# Altium PCB Pince-1.PcbDoc
Units mm, origin at the board's own origin, x right, y up, seen from the top; angles counter-clockwise.
Board outline 124 x 124 mm, 2 copper layers (Top Layer, Bottom Layer), stack 1.621 mm thick; 1 components, 2 nets, 30 pads, 0 vias.
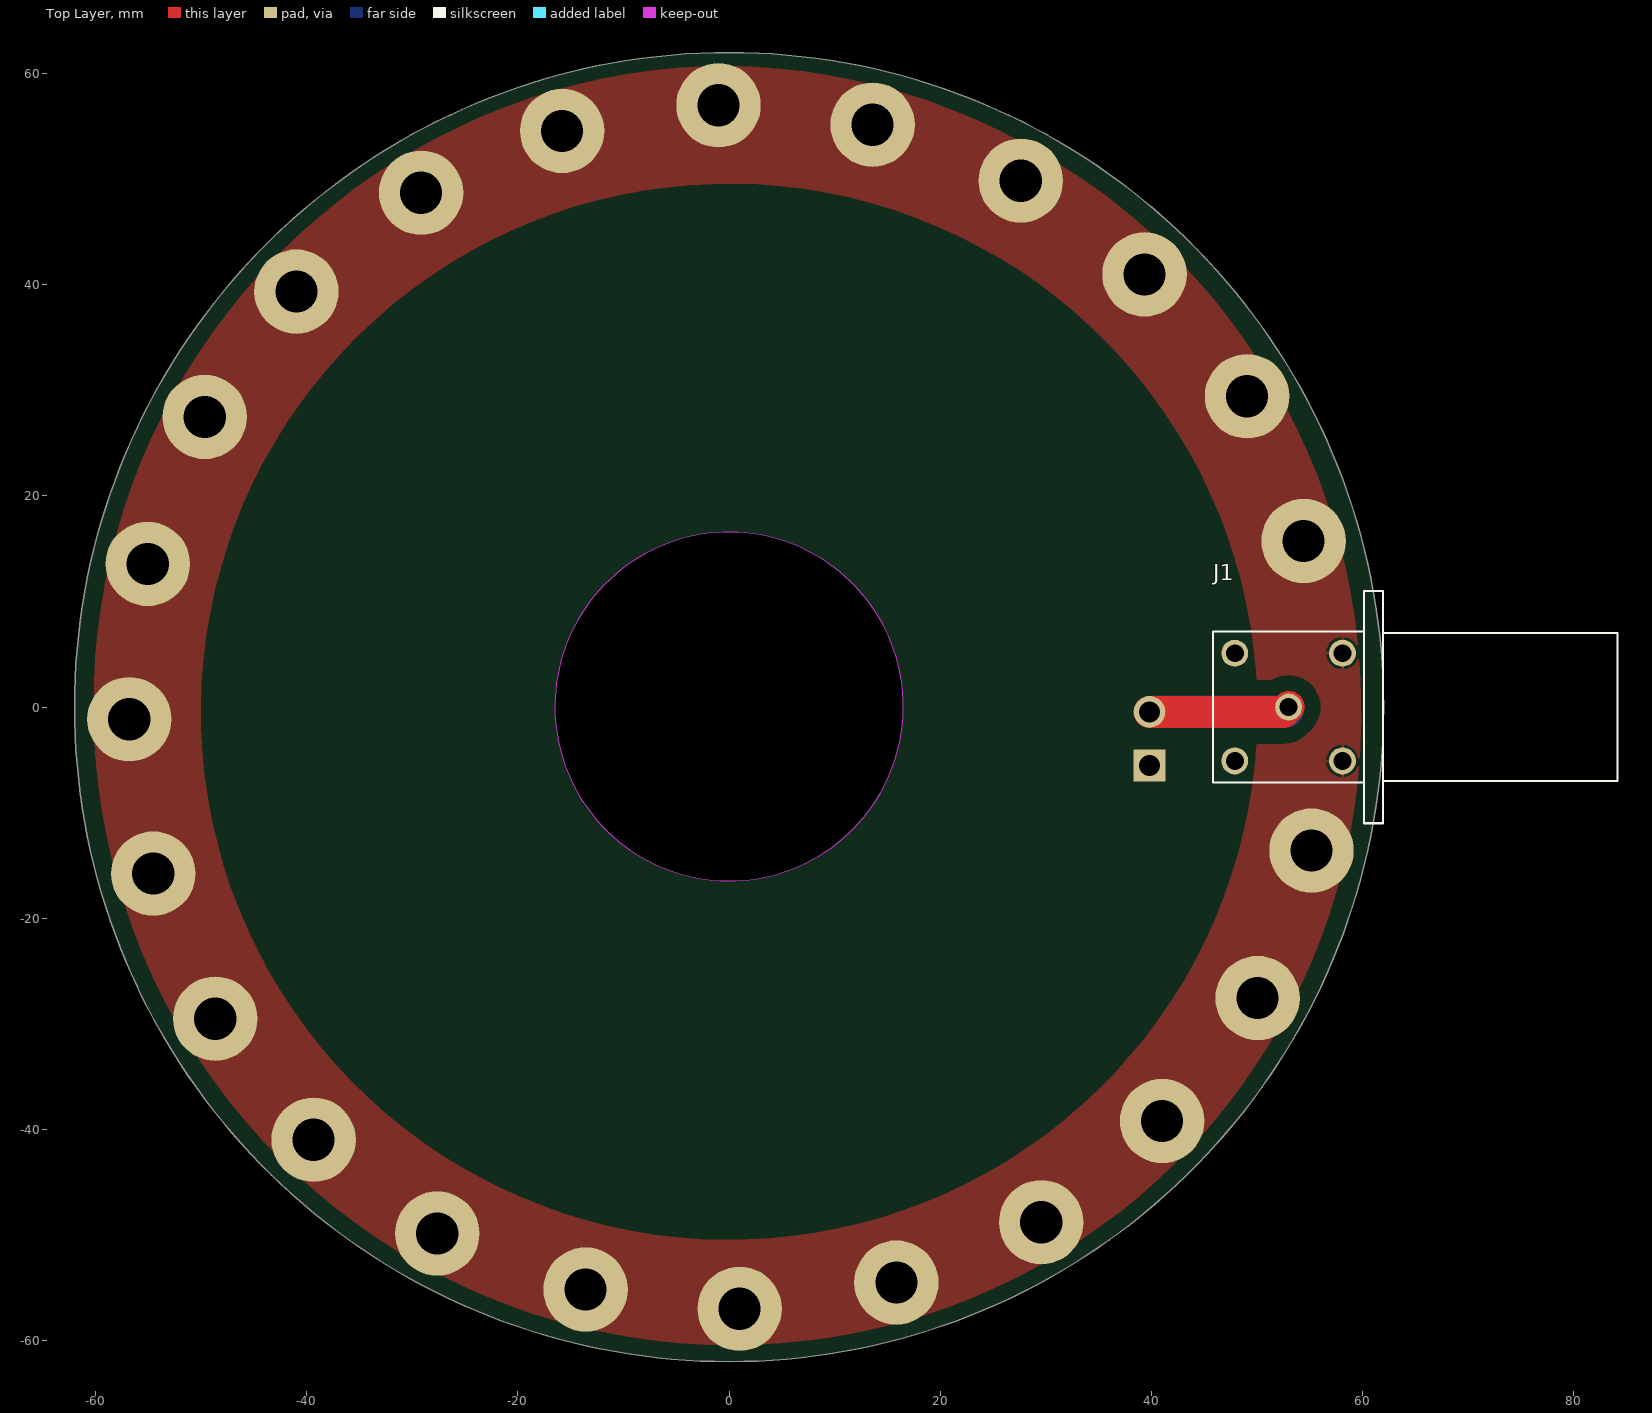
[diagram p0: Top Layer view]
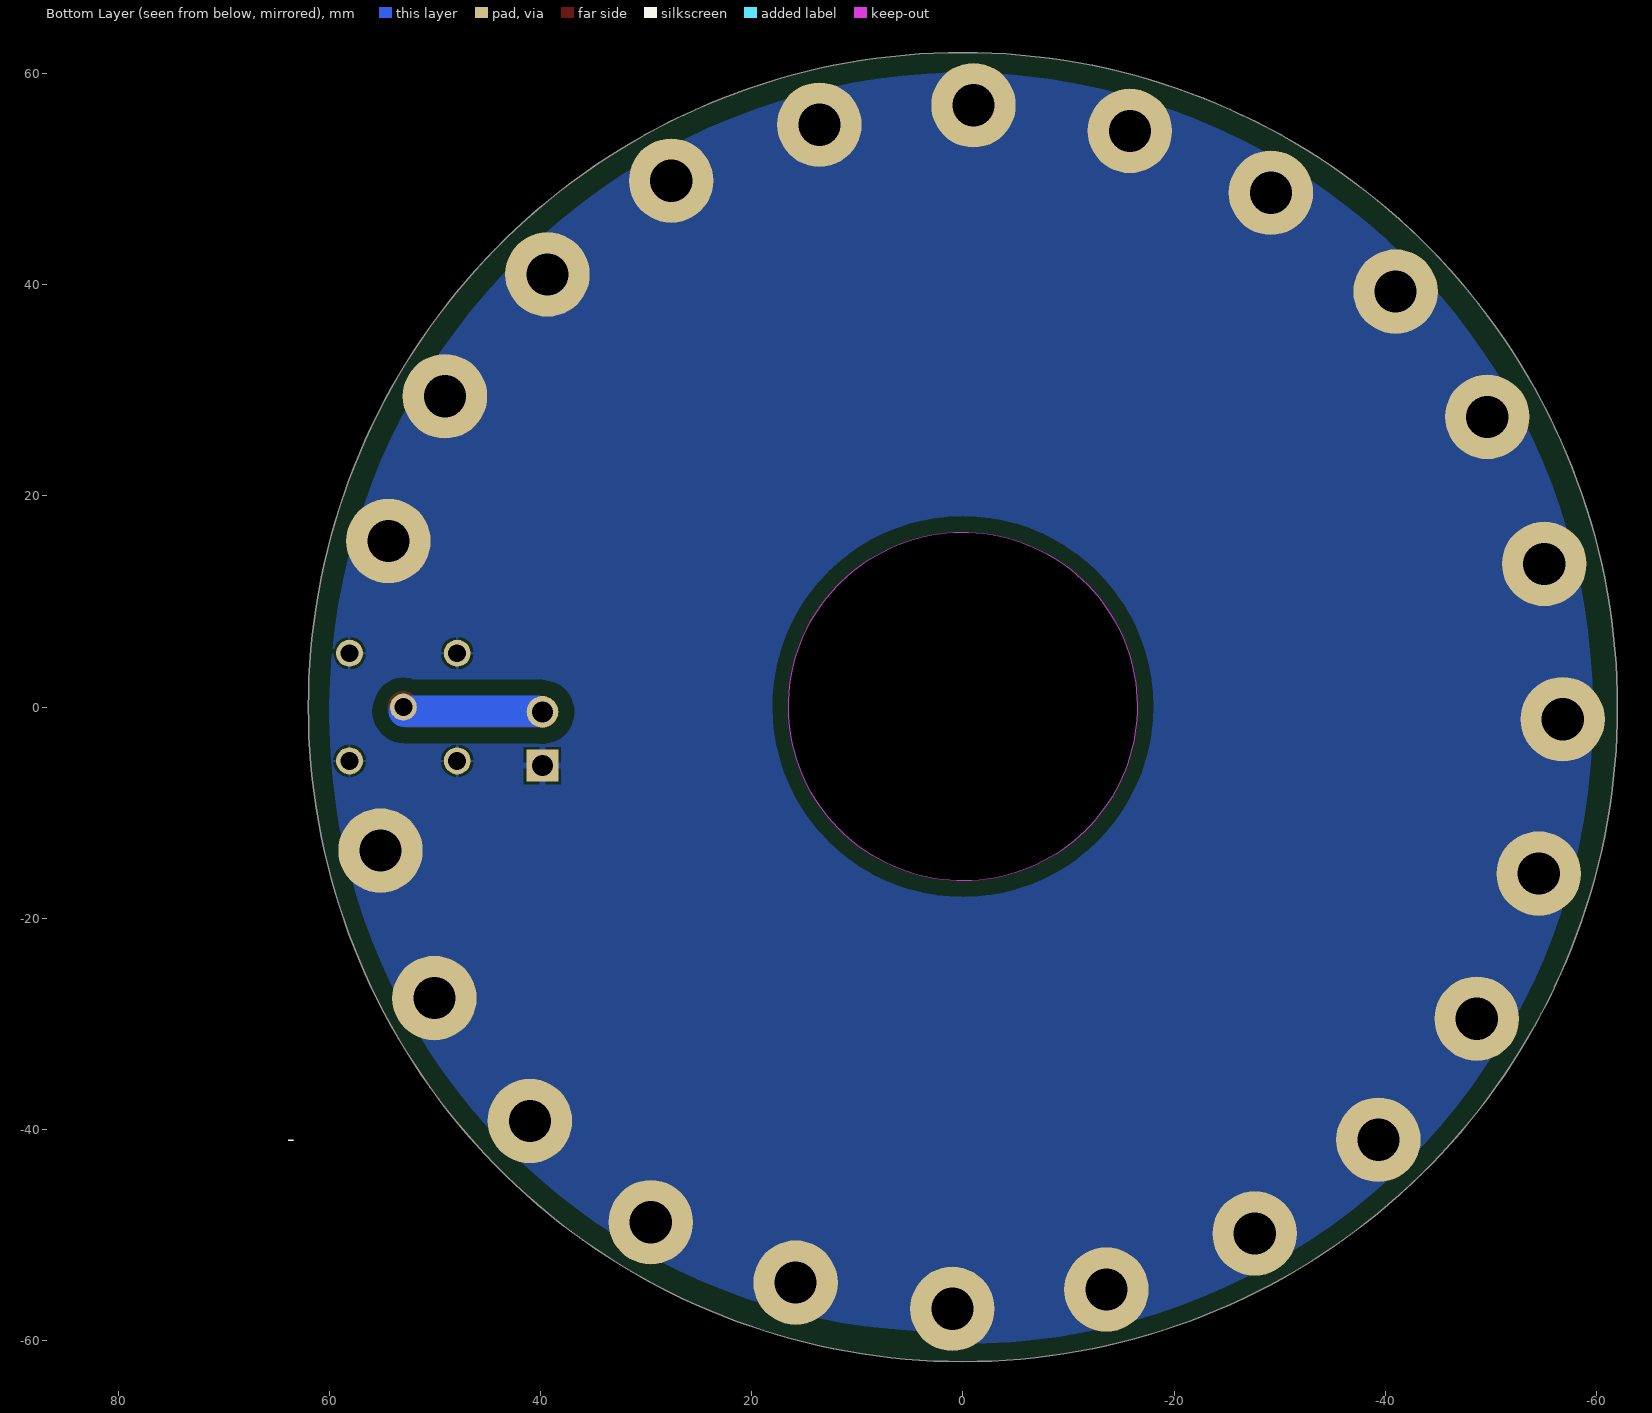
[diagram p1: Bottom Layer view, seen from below]

## Layer stack, top to bottom
Top Solder: solder mask 0.0102, Solder Resist, Dk 3.5
Top Layer: signal copper 0.0356
Dielectric 1: dielectric 1.55, FR-4, Dk 4.8
Bottom Layer: signal copper 0.0356
Bottom Solder: solder mask 0.0102, Solder Resist, Dk 3.5

## Board outline
0,-62 cw(c0,0) -62,0 cw(c0,0) 0,62 cw(c0,0) 62,0 cw(c0,0)
cut-out: -16.496,-0.505 ccw(c0.004,0.052) 16.504,0.609 ccw(c0.004,0.052)

## Design rules (kind name [scope] priority, off if disabled: settings)
Clearance Clearance_1 [InNamedPolygon('NONET_L-01_P-001')] p1: gap=1.5 ignorepadtopadclearanceinfootprint=FALSE
Clearance [All] p2: gap=0.254 ignorepadtopadclearanceinfootprint=FALSE except(0: Arc-Hole Track-Hole SMDPad-Hole THPad-Hole Via-Hole Fill-Hole Poly-Hole Region-Hole Text-Hole)
PolygonConnect [All] p1: connectstyle=Relief reliefconductorwidth=0.254 reliefentries=4 polygonreliefangle="90 Angle" airgapwidth=0.254
RoutingVias [All] p1: holewidth=0.711 width=1.27 viastyle="Through Hole" minholewidth=0.711 minwidth=1.27 maxholewidth=0.711 maxwidth=1.27
SolderMaskExpansion [All] p1: expansion=0.102 istentingtop=FALSE
Width [All] p1: maxlimit=5 minlimit=0.254 preferedwidth=0.6 minimp=50.000000 maximp=50.000000 favimp=50.000000
30 further rules are at their usual default settings.

## Components (designator, comment, footprint, x,y, rotation, side; value= is the part's Value field where it differs from the comment)
J1 "60411042241501" 60411042241501 53,0 r90 top

## Footprints (in the part's own frame and the unit in brackets; to place one, negate y for a bottom-side part, rotate by r counter-clockwise, add the part's x,y. Pads: shape width x height; smd on the part's side, far side on the other; paste and mask are expansions set on the pad)
60411042241501 [mm] "N Type PCB THT Jack"
  round 2.55 hole 1.7: 1(0,0) 2(-5.1,5.1) 3(5.1,5.1) 4(5.1,-5.1) 5(-5.1,-5.1)
  silkscreen extent -11,-31.15 11,7.15, body extent -11,-31.15 11,7.15, height 24.5

## Part data
J1: "WR-NTYPE N Type PCB Connector, Right Angle Jack, DC~4GHz, 50Ohm", Frequency Range=DC~4GHz, Manufacturer="Wurth Elektronik", Operating Temperature Max=165°C, Operating Temperature Min=-65°C, Category="Coaxial Connectors", Center Contact Diameter=1.6mm, ComponentLink1Description="Website Link", ComponentLink1URL=https://www.we-online.com/redexpert/article/60411042241501?ad, ComponentLink2Description="Datasheet Link", ComponentLink2URL=https://www.we-online.com/redexpert/spec/60411042241501?ad, Gender=Jack, Impedance=50Ohm, Manufacturer Part Number=60411042241501, Match Code=WR-NTYPE, Mount="Through Hole", Orientation="Right Angle", Packaging=Tray, Panel Thickness=6.5mm

## Free pads (board coordinates)
  rect 3x3 hole 2: 1(39.825,-5.54)
  round 3 hole 2: 2(39.825,-0.46)
  round 8 hole 4: 11(-56.804,-1.15) 11(-55.064,13.557) 11(-54.542,-15.773) 11(-49.667,27.484) 11(-48.667,-29.516) 11(-40.98,39.353) 11(-39.353,-40.98) 11(-29.17,48.713) 11(-27.634,-49.863) 11(-15.813,54.571) 11(-13.591,-55.166) 11(-1,57) 11(1,-57) 11(13.591,55.166) 11(15.849,-54.514) 11(27.634,49.863) 11(29.562,-48.793) 11(39.353,40.98) 11(41.016,-39.207) 11(49.059,29.436) 11(50.059,-27.564) 11(54.42,15.729) 11(55.166,-13.591)

## Nets (pads, with @x,y where several pads share a name; then routed paths per layer and width w, separated by ;. In a path a pad name is that pad's centre, name@x,y a point inside that pad or via, vN(x,y) a via of type N, cw(c..) or ccw(c..) an arc to the next point about the centre after c; other vN are vias at no path point)
NetJ1_1: J1.1 pad.2 | length 26
  Top Layer w3: pad.2 52.54,-0.46 J1.1
  Bottom Layer w3: pad.2@40.283,-0.4 J1.1@52.917,-0.4
NetJ1_2: J1.2 J1.3 J1.4 J1.5 pad.1 pad.11

## Polygon pours and split planes (outlines as drawn)
NetJ1_2 on Bottom Layer "NONET_L-01_P-001" (solid, pour order 1): -59.621,-2.313 ccw(c-0.174,-0.827) 1.312,-60.273 1.312,-59.147 ccw(c1.591,-0.738) 60,-1.016 ccw(c-0.662,-0.528) -0.174,60.134 ccw(c0.668,-0.174) -59.639,-1.016
no net on Bottom Solder "NONET_L-01_P-001" (solid): -1.8,41.3 0.7,41.3 0.7,31.3 ccw(c0.4,31.3) 0.4,31.6 0,31.6
NetJ1_2 on Top Layer "NONET_L-01_P-001" (solid, pour order 0): -60.148,-1.4 ccw(c0.093,-0.166) 1.327,-60.407 ccw(c0.38,-0.947) 59.84,0 ccw(c-1.08,-0.17) -1.25,60.75 ccw(c0.275,0.327) -60.148,-1.199

## Other copper
Top Layer:
  pour cut-out: -50,-1 ccw(c0,-0.443) 50,0.114 ccw(c0,-0.443)

## Silkscreen, mask and mechanical layers (free items; w line width, h text height)
Bottom Overlay:
  text "-" at 64,-40.498 h1.5 r180
Top Solder:
  lines w3: 39.9,-0.3 52.975,-0.24
Bottom Solder:
  drawing of 58 lines, arcs and shapes, not listed
  text "BCI INJECTION PROBE / CURRENT PROBE" at 53.55,-75.9 h4.5
Board Shape:
  circle w0.254: c0,0 r16.494
  circle w0.254: c0,0 r62
Bottom 3D Body:
  lines w0.1: 35.775,-8.08 34.325,-8.08 34.325,2.08 45.675,2.08 45.675,-8.08 36.274,-8.08 ; 35.777,-8.081 35.425,-8.68 36.625,-8.68 36.273,-8.081
Bottom Courtyard:
  lines w0.05: 39.5,-3 40.5,-3 ; 40,-3.5 40,-2.5 ; 34.125,-8.88 34.125,2.28 45.875,2.28 45.875,-8.88 34.125,-8.88